# Altium PCB PCBPadometer.PcbDoc
Units mm, origin at the board's own origin, x right, y up, seen from the top; angles counter-clockwise.
Board outline 45 x 35.3 mm, 2 copper layers (Top Layer, Bottom Layer); 23 components, 19 nets, 132 pads, 15 vias.
Unrouted connection lines stored in the file: 1.
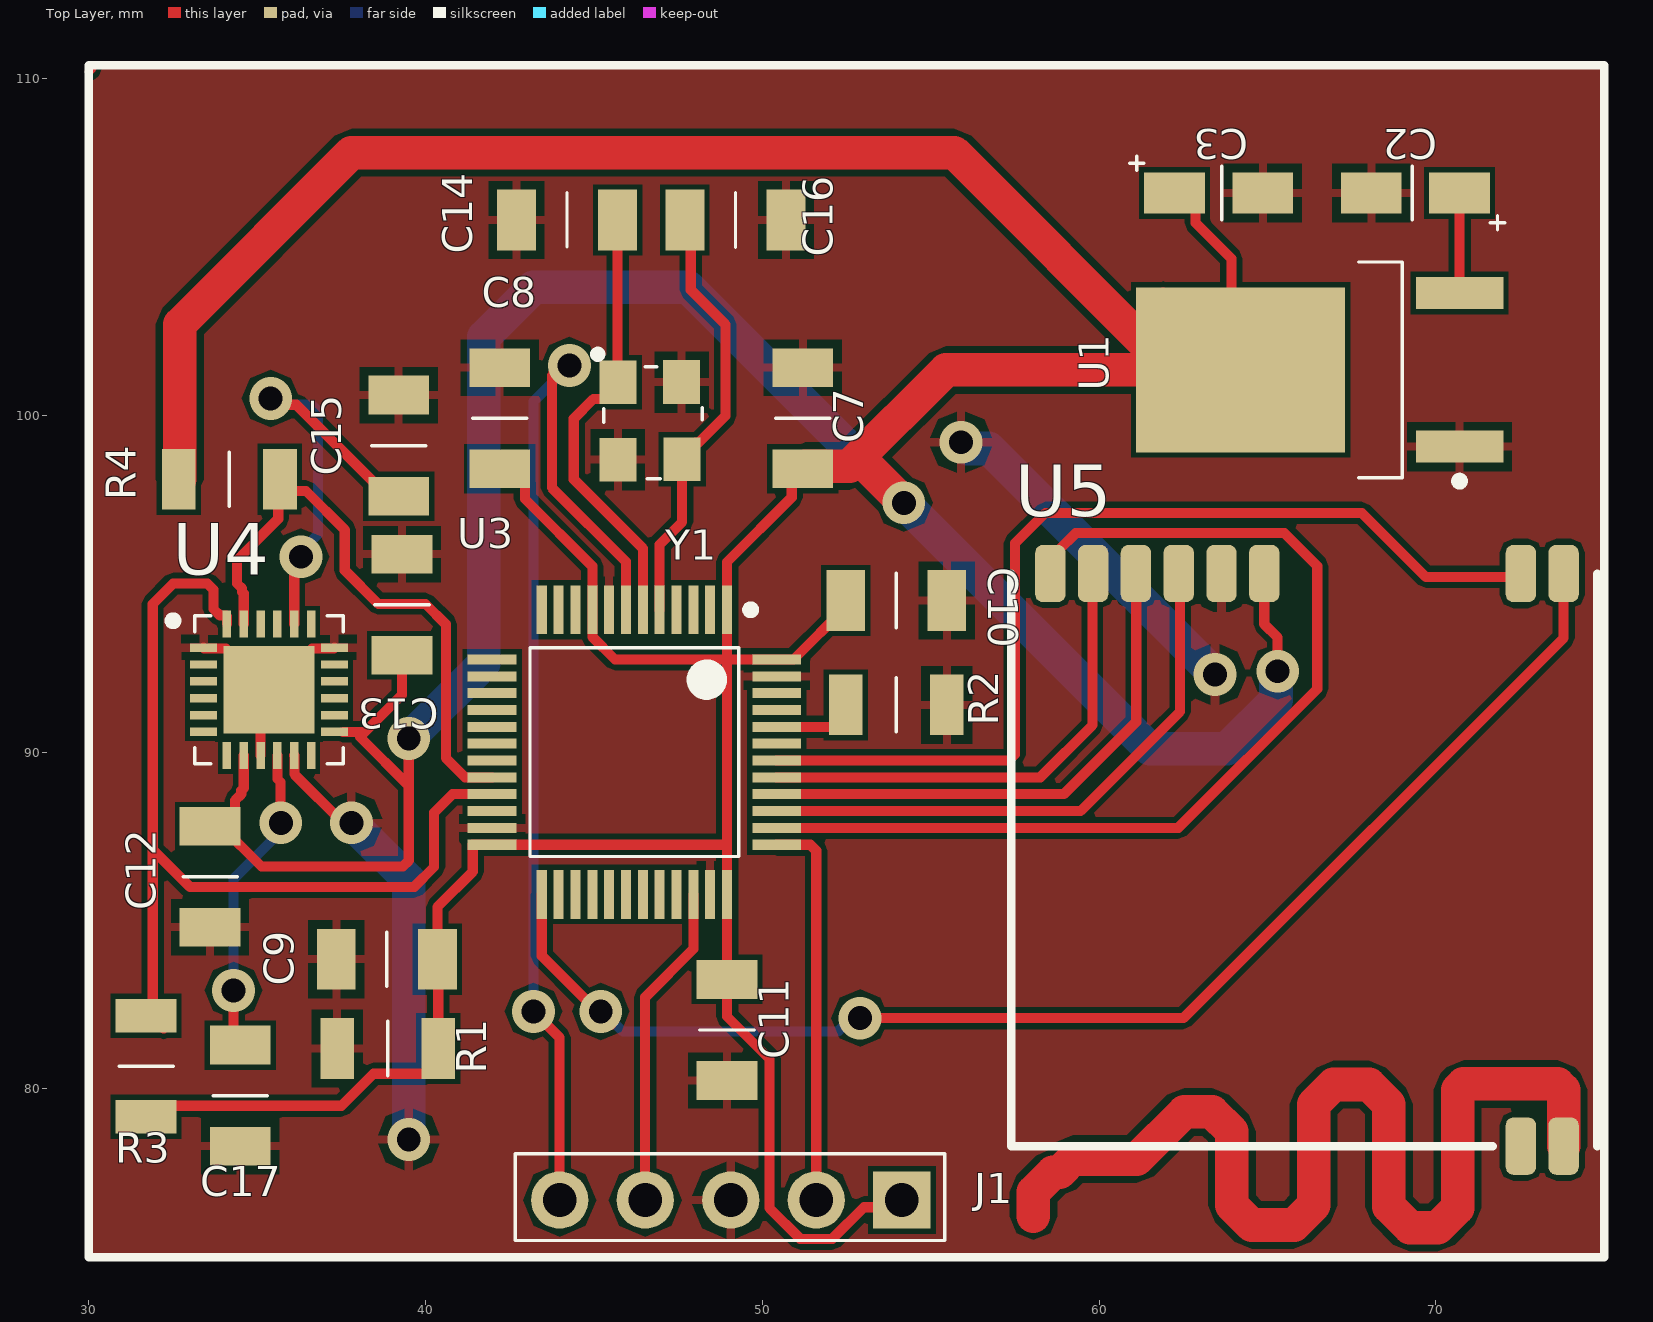
[diagram p0: Top Layer view]
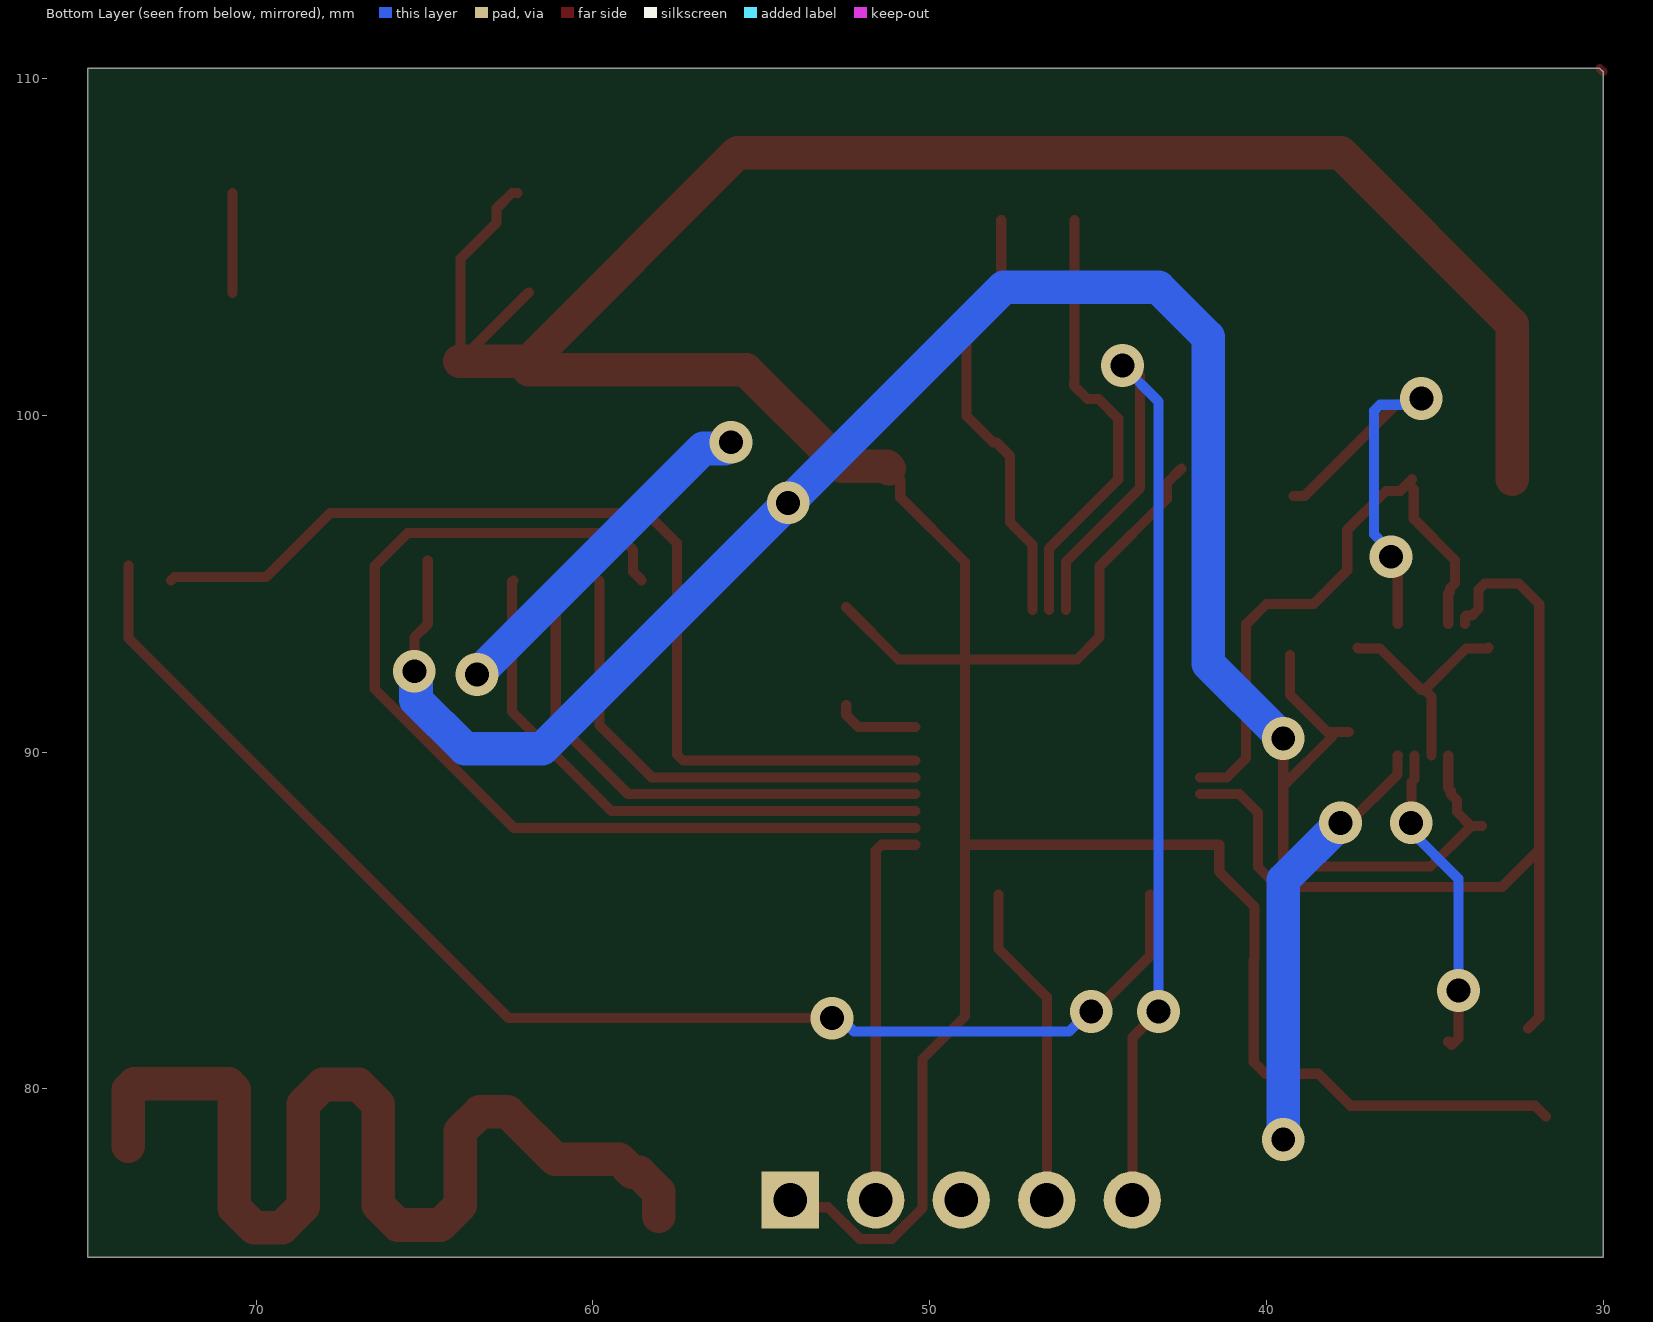
[diagram p1: Bottom Layer view, seen from below]
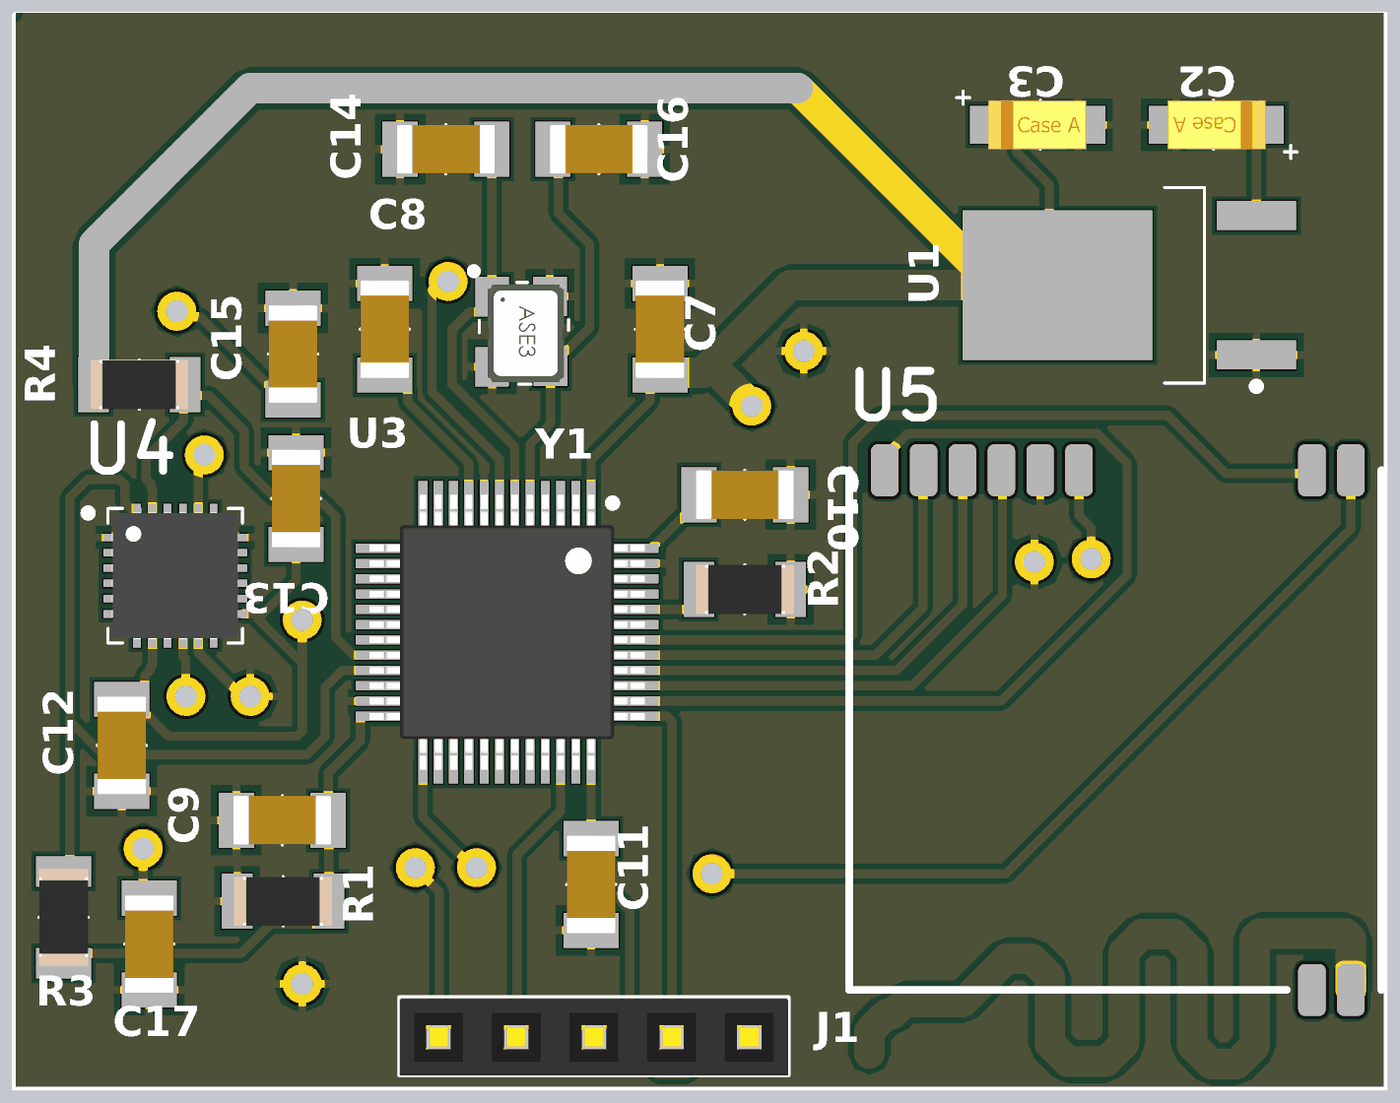
[diagram p2: 3D render of the assembled board from above, using the file's embedded part models]

## Layer stack, top to bottom
Top Solder: solder mask 0.0102, Solder Resist, Dk 3.5
Top Layer: signal copper 0.0356
Dielectric 1: dielectric 0.32, FR-4, Dk 4.8
Bottom Layer: signal copper 0.0356
Bottom Solder: solder mask 0.0102, Solder Resist, Dk 3.5

## Board outline
30,75 75,75 75,110.3 30.1,110.3 30,110.2

## Design rules (kind name [scope] priority, off if disabled: settings)
Clearance [All] p1: gap=0.254 ignorepadtopadclearanceinfootprint=FALSE except(0.152: Arc-Arc Arc-Track Arc-SMDPad Arc-Poly Track-Track Track-SMDPad Track-THPad Track-Poly SMDPad-SMDPad SMDPad-THPad SMDPad-Poly THPad-Poly Via-Poly Fill-Poly Poly-Poly)
PolygonConnect [All] p1: connectstyle=Relief reliefconductorwidth=0.254 reliefentries=4 polygonreliefangle="90 Angle" airgapwidth=0.254
RoutingVias [All] p1: holewidth=0.711 width=1.27 viastyle="Through Hole" minholewidth=0.711 minwidth=1.27 maxholewidth=0.711 maxwidth=1.27
SolderMaskExpansion [All] p1: expansion=0.102 istentingtop=FALSE
Width [All] p1: maxlimit=1 minlimit=0.254 preferedwidth=0.3 minimp=50.000000 maximp=50.000000 favimp=50.000000
30 further rules are at their usual default settings.

## Components (designator, comment, footprint, x,y, rotation, side; value= is the part's Value field where it differs from the comment)
C2 "10 uF - Tantal" "C1206- TANTAL" 69.3,106.6 r180 top
C3 "10 uF - Tantal" "C1206- TANTAL" 63.637,106.6 r0 top
C7 "0.1 uF C1206" C1206 50.7,99.339 r90 top
C8 "0.1 uF C1206" C1206 41.7,99.339 r90 top
C9 "0.1 uF C1206" C1206 39.425,83.35 r180 top
C10 "0.1 uF C1206" C1206 53.4,95 r0 top
C11 "0.1 uF C1206" C1206 49.45,82.325 r270 top
C12 "0.1 uF C1206" C1206 34.1,86.875 r270 top
C13 "0.1 uF C1206" C1206 38.8,93.8 r90 top
C14 "16 pF" C1206 43.625,106.3 r0 top
C15 "2.2 nF c1206" C1206 38.7,98.525 r90 top
C16 "16 pF" C1206 49.775,105.3 r180 top
C17 "0.1 uF C1206" C1206 34,79.225 r90 top
J1 "Header 2.54 1x5" "Header 2.54 1x5" 54.14,76.7 r180 top
R1 "10K R1206" "R1206 Resıstor" 38.8,81.2 r0 top
R2 "10K R1206" "R1206 Resıstor" 53.9,91.4 r0 top
R3 "10K R1206" "R1206 Resıstor" 31.7,80.6 r90 top
R4 "10K R1206" "R1206 Resıstor" 34.1,98.1 r0 top
U1 "LD108633 DPAK" DPAK228P972X230-3N 66.55,101.35 r180 top
U3 "STM32F101_1" LQFP48-STM 46.2,90 r270 top
U4 "MPU6050_1" QFN50P400X400X90_HS-25N 35.35,91.85 r0 top
U5 "DRF1278F" DRF1278F 73.79,95.3 r270 top
Y1 "8 MHz 12.5 pf Osc" "8 MHZ Osc." 46.2,100 r270 top

## Footprints (in the part's own frame and the unit in brackets; to place one, negate y for a bottom-side part, rotate by r counter-clockwise, add the part's x,y. Pads: shape width x height; smd on the part's side, far side on the other; paste and mask are expansions set on the pad)
"8 MHZ Osc." [mm]
  rect 1.3x1.1 smd mask+0.05: 1(-0.981,-0.49) 2(1.319,-0.49) 3(1.303,1.417) 4(-0.986,1.401)
  silkscreen extent -1.91,-1.19 1.88,2.01, body extent -1.38,-0.64 1.82,1.86, height 1.22
C1206 [mm]
  rect 1.15x1.8 smd mask+0.05: 1(-0.925,-0.5) 2(2.075,-0.5)
  silkscreen extent 0.58,-1.3 0.58,0.31, body extent -1.02,-1.3 2.18,0.3, height 1
"C1206- TANTAL" [mm]
  rect 1.8x1.23 smd mask+0.05: 1(-1.4,0) 1(-1.4,0) 2(1.22,0)
  silkscreen extent -2.74,-0.8 0,1.1, body extent -1.7,-0.8 1.5,0.8, height 1.62
DPAK228P972X230-3N [mm] "D-PAK, 3-Pads, Body 6,40x6,56mm (max), IPC Medium Density"
  rect 2.6x0.95 smd mask+0.05: 1(-4.15,2.28) 2(-4.15,-2.28)
  rect 6.2x4.9 smd mask+0.05: 3(2.35,0)
  silkscreen extent -4.28,-3.2 -1.15,3.43, body extent -2.5,-3.2 4.1,3.2, height 2.3
DRF1278F [mm]
  rrect50% 1.7x0.9 smd: 1(0,0) 1(0,0) 2(0,-1.27) 8(0,-8.89) 9(0,-10.16) 10(0,-11.43) 11(0,-12.7) 12(0,-13.97) 13(0,-15.24) 14(17,0) 15(17,-1.27)
  silkscreen extent 0,-16.4 17,1
"Header 2.54 1x5" [mm]
  rect 1.7x1.7 hole 1 mask+0.05: 1(0,0)
  round 1.7 hole 1 mask+0.05: 2(2.54,0) 3(5.08,0) 4(7.62,0) 5(10.16,0)
  silkscreen extent -1.28,-1.37 11.48,1.2, body extent -1.25,-1.3 11.45,1.2, height 9.1
LQFP48-STM [mm] "TSQFP, 48-Leads, Body 7,00x7,00mm, Pitch 0,50mm, IPC Medium Density"
  rect 1.45x0.3 smd mask+0.05: 1(-4.225,2.75) 2(-4.225,2.25) 3(-4.225,1.75) 4(-4.225,1.25) 5(-4.225,0.75) 6(-4.225,0.25) 7(-4.225,-0.25) 8(-4.225,-0.75) 9(-4.225,-1.25) 10(-4.225,-1.75) 11(-4.225,-2.25) 12(-4.225,-2.75) 25(4.225,-2.75) 26(4.225,-2.25) 27(4.225,-1.75) 28(4.225,-1.25) 29(4.225,-0.75) 30(4.225,-0.25) 31(4.225,0.25) 32(4.225,0.75) 33(4.225,1.25) 34(4.225,1.75) 35(4.225,2.25) 36(4.225,2.75)
  rect 0.3x1.45 smd mask+0.05: 13(-2.75,-4.225) 14(-2.25,-4.225) 15(-1.75,-4.225) 16(-1.25,-4.225) 17(-0.75,-4.225) 18(-0.25,-4.225) 19(0.25,-4.225) 20(0.75,-4.225) 21(1.25,-4.225) 22(1.75,-4.225) 23(2.25,-4.225) 24(2.75,-4.225) 37(2.75,4.225) 38(2.25,4.225) 39(1.75,4.225) 40(1.25,4.225) 41(0.75,4.225) 42(0.25,4.225) 43(-0.25,4.225) 44(-0.75,4.225) 45(-1.25,4.225) 46(-1.75,4.225) 47(-2.25,4.225) 48(-2.75,4.225)
  silkscreen extent -4.35,-3.1 3.1,3.58, body extent -4.5,-4.5 4.5,4.5, height 1.6
QFN50P400X400X90_HS-25N [mm] "QFN, 24-Leads, Body 4,00x4,00mm, Pitch 0,50mm, Thermal Pad 2,70x2,60mm, IPC Medium Density"
  rect 0.8x0.25 smd mask+0.05: 1(-1.95,1.25) 2(-1.95,0.75) 3(-1.95,0.25) 4(-1.95,-0.25) 5(-1.95,-0.75) 6(-1.95,-1.25) 13(1.95,-1.25) 14(1.95,-0.75) 15(1.95,-0.25) 16(1.95,0.25) 17(1.95,0.75) 18(1.95,1.25)
  rect 0.25x0.8 smd mask+0.05: 7(-1.25,-1.95) 8(-0.75,-1.95) 9(-0.25,-1.95) 10(0.25,-1.95) 11(0.75,-1.95) 12(1.25,-1.95) 19(1.25,1.95) 20(0.75,1.95) 21(0.25,1.95) 22(-0.25,1.95) 23(-0.75,1.95) 24(-1.25,1.95)
  rect 2.7x2.6 smd mask+0.05: 25(0,0)
  silkscreen extent -2.97,-2.2 2.2,2.2, body extent -2.07,-2.07 2.07,2.07, height 0.9
"R1206 Resıstor" [mm]
  rect 1x1.8 smd mask+0.05: 1(-1.425,0) 2(1.575,0)
  silkscreen extent 0.08,-0.8 0.08,0.81, body extent -1.52,-0.8 1.68,0.81, height 0.55

## Part data
U1: "LD1086 3.3V REGULATOR"
U3: "STM32F101 48 PİNLİ MİKROİŞLEMCİ"
U4: "MPU6050 GYRO"

## Via types
v1: diameter 1.27, hole 0.711, Top Layer to Bottom Layer, 15 vias

## Nets (pads, with @x,y where several pads share a name; then routed paths per layer and width w, separated by ;. In a path a pad name is that pad's centre, name@x,y a point inside that pad or via, vN(x,y) a via of type N, cw(c..) or ccw(c..) an arc to the next point about the centre after c; other vN are vias at no path point)
"3.3 V": C3.1 C7.1 C8.1 C9.1 C10.1 C11.1 C12.1 C13.1 J1.1 R1.2 R3.1 R4.1 U1.3 U3.1 U3.9 U3.24 U3.36 U3.48 U4.8 U4.13 U5.8 | length 197
  Top Layer w0.3: R3.1 32.025,79.5 37.502,79.5 38.452,80.45 40.025,80.45 40.375,80.8 R1.2 40.375,83.825 C9.1 40.35,85.4 41.4,86.45 41.4,87.25 U3.24 48.95,87.25 ; C12.1 C12.1@33.925,87.8 ; U4.8 34.6,88.929 34.527,88.856 34.527,88.752 34.343,88.568 34.343,88.218 C12.1@33.925,87.8 ; U4.13@37.55,90.6 38.05,90.6 38.2,90.6 ; C13.1 39.3,91.7 38.2,90.6 ; v1(39.5,90.4) 39.5,89 ; C8.1@42.525,98.414 42.95,97.989 42.95,97.517 44.95,95.517 U3.9 44.95,93.423 45.623,92.75 48.95,92.75 ; C10.1@52.475,94.3 50.925,92.75 U3.48 48.95,92.75 ; 53.186,98.414 C7.1 50.87,98.085 50.87,97.565 48.95,95.645 U3.1 48.95,92.75 ; J1.1 53.927,76.487 53.016,76.487 52.077,75.548 51.123,75.548 50.212,76.459 50.212,80.89 48.95,82.152 C11.1 U3.36 48.95,87.25 ; U1.3@61.9,103.65 U1.3@63.89,101.66 ; C3.1@62.237,106.6 62.398,106.6 62.863,106.135 62.863,105.711 63.925,104.648 63.925,101.66 U1.3@63.89,101.66 ; U1.3 63.95,101.6 U1.3@63.89,101.66 ; U5.8@64.9,95.68 U5.8 64.9,93.8 65.3,93.4 v1(65.3,92.4) ; C12.1@33.925,87.8 35.125,86.6 39.324,86.6 39.5,86.776 39.5,89 ; 38.2,90.6 38.05,90.45 39.5,89 ; 48.95,87.25 48.95,92.75
  Top Layer w1: R4.1@32.7,98.1 32.7,102.7 37.8,107.8 55.7,107.8 61.9,101.6 U1.3@63.95,101.6 ; C7.1 51.275,98.489 52.589,98.489 55.45,101.35 U1.3@61.9,101.35 ; 53.186,98.414 v1(54.2,97.4)
  Bottom Layer w1: v1(39.5,90.4) 41.728,92.628 41.728,102.328 43.2,103.8 47.8,103.8 v1(54.2,97.4) 61.5,90.1 63.8,90.1 65.248,91.548 65.248,92.348 v1(65.3,92.4)
"7.4 V": C2.1 U1.2 | length 3
  Top Layer w0.3: U1.2 C2.1@70.7,106.6
GND: C2.2 C3.2 C7.2 C8.2 C9.2 C10.2 C11.2 C12.2 C13.2 C14.1 C15.2 C16.1 C17.1 J1.3 R1.1 R2.2 U1.1 U3.8 U3.23 U3.35 U3.47 U4.1 U4.9 U4.11 U4.18 U4.25 U5.9 Y1.2 Y1.4 | length 30.3
  Top Layer w0.3: U4.1 33.425,93.075 34.075,93.075 U4.25@35.3,91.85 ; U4.9 35.1,91.65 U4.25@35.3,91.85 ; U4.11 36.102,89.898 36.102,89.346 37.548,87.9 v1(37.8,87.9) ; U4.18 37.275,93.075 36.625,93.075 35.4,91.85 U4.25 U4.25@35.3,91.85
  Bottom Layer w0.3: v1(55.9,99.2) v1@56.086,99.014
  Bottom Layer w1: v1(37.8,87.9) 39.5,86.2 v1(39.5,78.5) ; v1@56.086,99.014 56.725,99.014 v1(63.439,92.3)
NetC14_2: C14.2 U3.6 Y1.1 | length 13.1
  Top Layer w0.3: C14.2 45.7,100.992 Y1.1 ; Y1.1@45.71,100.949 45.71,100.881 45.31,100.481 44.981,100.481 44.4,99.9 44.4,98.1 46.45,96.05 46.45,94.888 U3.6
NetC15_1: C15.1 U4.20 | length 13.2
  Top Layer w0.3: v1(35.4,100.5) 35.586,100.314 36.161,100.314 38.875,97.6 C15.1 ; U4.20 36.1,95.338 36.3,95.538 v1(36.3,95.8)
  Bottom Layer w0.3: v1(35.4,100.5) 35.586,100.314 36.624,100.314 36.8,100.139 36.8,96.461 36.3,95.961 v1(36.3,95.8)
NetC16_2: C16.2 U3.5 Y1.3 | length 12.9
  Top Layer w0.3: U3.5 46.95,96.165 47.617,96.832 Y1.3 47.617,98.797 48.017,99.197 48.117,99.197 48.9,99.979 48.9,102.7 47.874,103.726 C16.2@47.874,105.8
NetC17_2: C17.2 U4.10 | length 9.5
  Top Layer w0.3: v1(34.3,82.925) 34.3,81.5 C17.2 C17.2@34.6,81.4 ; U4.10 35.6,89.209 35.694,89.115 35.694,87.906 v1(35.7,87.9)
  Bottom Layer w0.3: v1@34.3,82.9 v1(34.3,82.925) 34.3,86.239 35.7,87.639 v1(35.7,87.9)
NetJ1_2: J1.2 U3.37 | length 11.6
  Top Layer w0.3: U3.37 51.424,87.25 51.6,87.074 J1.2
NetJ1_4: J1.4 U3.34 | length 9.7
  Top Layer w0.3: J1.4 46.52,82.722 47.95,84.152 U3.34
NetJ1_5: J1.5 U3.7 | length 34.1
  Top Layer w0.3: v1(43.2,82.3) 43.98,81.52 J1.5 ; v1(44.271,101.476) 44.039,101.476 43.748,101.186 43.748,97.852 45.95,95.65 U3.7
  Bottom Layer w0.3: v1(43.2,82.3) 43.2,100.405 v1(44.271,101.476)
NetR2_1: R2.1 U3.44 | length 2.5
  Top Layer w0.3: U3.44 52.125,90.75 52.475,91.1 R2.1
NetR3_2: R3.2 U3.21 U4.24 | length 28.8
  Top Layer w0.3: R3.2@32.225,81.8 31.9,82.125 31.9,87.1 ; U4.24 34.1,94.025 34.075,94.05 33.901,94.05 33.7,94.251 33.7,94.824 33.524,95 32.5,95 31.9,94.4 31.9,87.1 ; U3.21 40.8,88.75 40.252,88.202 40.252,86.589 39.663,86 33,86 31.9,87.1
NetR4_2: R4.2 U3.20 U4.23 | length 17.8
  Top Layer w0.3: U4.23 34.6,94.704 34.552,94.752 34.552,94.856 34.4,95.008 34.4,95.7 35.626,96.926 35.626,97.801 R4.2@35.8,97.975 ; R4.2 R4.2@35.8,97.975 ; U3.20 41.173,89.25 40.6,89.823 40.6,93.8 40,94.4 38.598,94.4 37.6,95.398 37.6,96.6 36.449,97.751 36.024,97.751 R4.2@35.8,97.975
NetU3_25: U3.25 U5.1 | length 40.6
  Top Layer w0.3: U3.25 43.45,83.95 v1@45.5,81.9 ; v1(52.9,82.1) 62.5,82.1 73.79,93.39 73.79,94.741 73.79,95.1 U5.1@73.79,95.541
  Bottom Layer w0.3: v1(45.2,82.3) 45.261,82.3 45.861,81.7 52.239,81.7 52.639,82.1 v1(52.9,82.1)
NetU3_38: U3.38 U5.13 | length 30.7
  Top Layer w0.3: U3.38 62.35,87.75 66.476,91.876 66.476,95.524 65.5,96.5 59.3,96.5 58.804,96.004 58.804,95.354 U5.13@58.55,95.1
NetU3_39: U3.39 U5.10 | length 17.1
  Top Layer w0.3: U3.39 59.45,88.25 62.4,91.2 62.4,95.06 U5.10@62.36,95.1
NetU3_40: U3.40 U5.11 | length 15.8
  Top Layer w0.3: U3.40 58.95,88.75 61.1,90.9 61.1,95.09 U5.11@61.09,95.1
NetU3_41: U3.41 U5.12 | length 14.3
  Top Layer w0.3: U3.41 58.25,89.25 59.8,90.8 59.8,95.08 U5.12@59.82,95.1
NetU3_42: U3.42 U5.2 | length 29.6
  Top Layer w0.3: U3.42 57.324,89.75 57.5,89.926 57.5,96.2 58.4,97.1 67.8,97.1 69.7,95.2 72.42,95.2 U5.2@72.52,95.1
pads on no net: U3.2 U3.3 U3.4 U3.10 U3.11 U3.12 U3.13 U3.14 U3.15 U3.16 U3.17 U3.18 U3.19 U3.22 U3.26 U3.27 U3.28 U3.29 U3.30 U3.31 U3.32 U3.33 U3.43 U3.45 U3.46 U4.2 U4.3 U4.4 U4.5 U4.6 U4.7 U4.12 U4.14 U4.15 U4.16 U4.17 U4.19 U4.21 U4.22 U5.14 U5.15
copper on no net: | length 32.9
  Top Layer w0.254: 30,110.2 30.1,110.3
  Top Layer w0.3: 59.559,77.567 59.574,77.582
  Top Layer w1: 58.045,76.22 58.045,76.936 58.631,77.522 58.825,77.522 59.215,77.911 61.117,77.911 62.526,79.32 63.354,79.32 63.94,78.734 63.94,76.544 64.526,75.958 65.783,75.958 66.369,76.544 66.369,79.542 66.955,80.128 68.014,80.128 68.6,79.542 68.6,76.505 69.228,75.878 70.056,75.878 70.642,76.464 70.642,79.972 70.818,80.148 73.614,80.148 73.79,79.972 73.79,78.3

## Polygon pours and split planes (outlines as drawn)
GND on Top Layer "GND_L01_P000" (solid, pour order 0): 30.1,110.3 30.233,110.433 75.051,110.433 75.051,74.825 74.907,74.968 29.914,74.968

## Silkscreen, mask and mechanical layers (free items; w line width, h text height)
Top Overlay:
  lines w0.254: 30,75 75,75 75,110.389 30,110.389 30,75